# Altium PCB AICat V1.3.双面板 板厚1.6mm.PcbDoc (part 2 of 3)
Units mm, origin at the board's own origin, x right, y up, seen from the top; angles counter-clockwise.
Board outline 152.4 x 101.6 mm, 2 copper layers (Top Layer, Bottom Layer); 95 components, 81 nets, 296 pads, 205 vias.
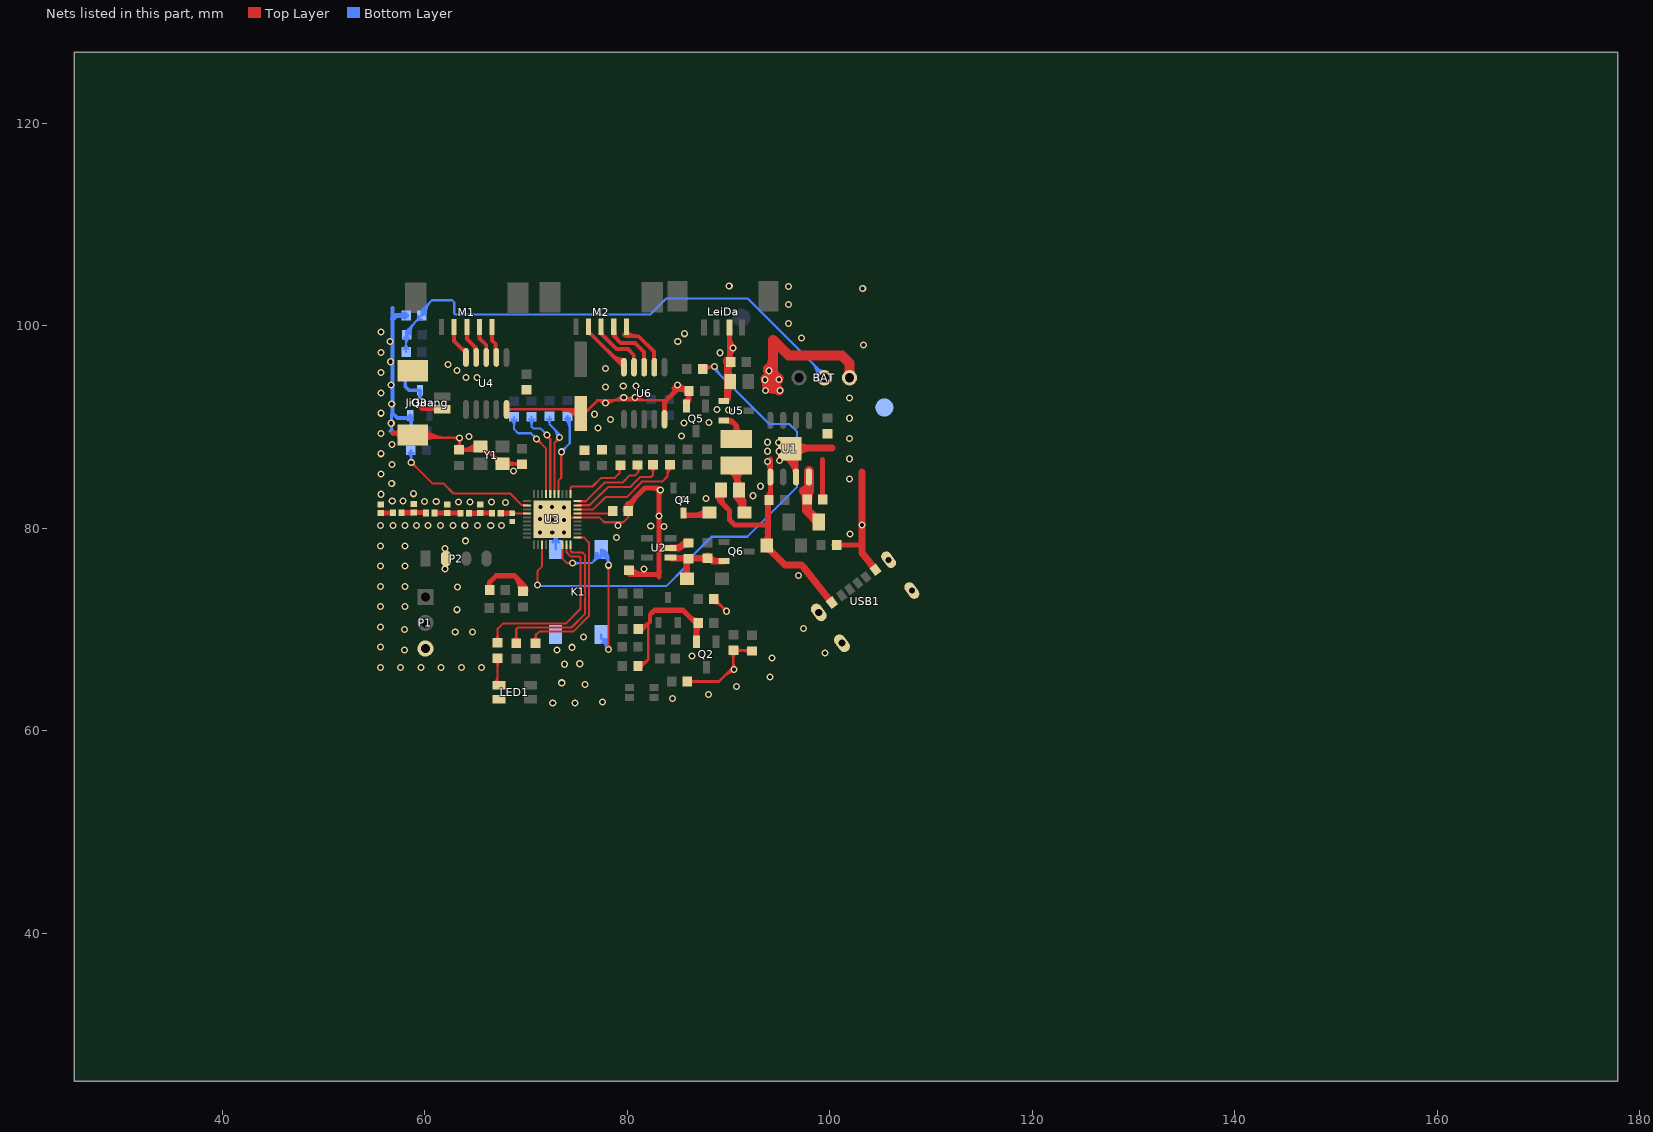
[diagram p2: the nets of this part, all layers, seen from the top]

## Via types
v1: diameter 0.7, hole 0.4, Top Layer to Bottom Layer, tented both sides, 205 vias

## Nets (pads, with @x,y where several pads share a name; then routed paths per layer and width w, separated by ;. In a path a pad name is that pad's centre, name@x,y a point inside that pad or via, vN(x,y) a via of type N, cw(c..) or ccw(c..) an arc to the next point about the centre after c; other vN are vias at no path point) (continued)
GND: BAT.1 C1.1 C2.1 C4.1 C5.2 C6.1 C8.2 C9.1 C11.1 C12.1 C13.1 C14.1 C16.1 C17.1 C18.2 C19.2 C20.2 C21.1 C22.1 C24.1 C25.2 C26.2 C27.1 D1.1 D2.2 GND.1 JiGuang.3 JiGuang.4 K1.1 K1.2 LED1.1 LeiDa.2 P1.4 P2.2 Q2.2 Q3.2 Q5.2 R1.1 R4.2 R5.2 R13.1 R17.2 R18.1 R20.1 R34.1 R36.2 R37.1 U1.1 U1.3 U1.9 U2.2 U3.16 U3.41 U4.5 U5.1 U6.5 USB1.7 USB1.A12 USB1.B12 Y1.2 Y1.4 | length 375.2
  Top Layer w0.203: U3.41@74.315,80.99 74.396,81.071 77.247,81.071 77.724,80.594 79.604,80.594 80.094,81.085 ; C22.1@80.094,81.712 80.094,81.085 ; 80.094,81.085 cw(c80.411,81.085) 80.263,81.365 ccw(c80.411,81.085) 80.094,81.085 ; 80.094,81.085 ccw(c79.777,81.085) 79.925,81.365 cw(c79.777,81.085) 80.094,81.085
  Top Layer w0.254: C16.1@63.398,87.74 63.449,87.79 v1(63.449,88.925) 59.104,88.925 JiGuang.4@58.824,89.205 58.621,89.408 56.718,89.408 ; Y1.4@65.495,88.076 65.772,88.076 67.472,86.376 Y1.2@67.695,86.376 ; U4.5@68.077,91.732 75.012,91.732 C20.2@75.41,91.335 75.765,91.335 77.064,92.634 ; 77.462,92.634 cw(c77.462,92.174) v1@77.879,92.367 ; v1@77.649,92.26 ccw(c77.064,91.989) 77.064,92.634 ; v1@77.829,92.376 cw(c78.451,91.755) 78.451,92.634 ; v1@78.009,92.197 cw(c79.064,91.142) 79.064,92.634 ; 78.442,92.634 ccw(c78.442,94.126) v1@79.497,93.071 ; 79.055,92.634 ccw(c79.055,93.513) v1@79.676,92.891 ; v1@79.559,92.634 ccw(c79.559,94.126) v1@80.614,93.071 ; v1@79.632,92.891 ccw(c80.254,93.513) 80.254,92.634 ; v1@79.812,93.071 ccw(c80.867,94.126) v1@80.867,92.634 ; 80.172,92.634 ccw(c80.172,93.513) v1@80.794,92.891 ; v1@80.75,92.891 ccw(c81.372,93.513) 81.372,92.634 ; v1@80.93,93.071 ccw(c81.985,94.126) 81.985,92.634 ; C9.1@81.059,66.396 81.458,66.396 82.067,67.005 ; C9.1@81.08,66.502 ccw(c81.251,67.187) 81.75,66.688 ; C9.1@81.141,66.749 ccw(c81.378,67.695) 82.067,67.005 ; 82.054,70.573 82.067,70.56 82.067,67.005 ; 84.103,92.866 83.871,92.634 77.064,92.634 ; R18.1@85.936,64.872 89.052,64.872 89.529,65.348 ; R18.1@86.175,64.633 cw(c86.752,64.056) 86.752,64.872 cw(c86.752,65.688) R18.1@86.175,65.111 ; R37.1@88.552,72.637 cw(c88.552,71.657) 89.245,72.35 ; R37.1@88.552,73 88.595,73 v1(89.789,71.806) ; R37.1@88.89,72.975 ccw(c89.543,72.975) 89.081,72.513 ; 89.332,65.151 89.529,65.348 ; v1@89.566,71.806 ccw(c89.028,71.806) 89.408,72.186 ccw(c89.789,72.567) v1@89.789,72.029 ; R4.2@92.304,67.886 92.253,67.937 R5.2@90.475,67.937 90.475,66.294 89.529,65.348 ; 56.718,89.408 cw(c56.718,88.55) 57.516,88.866 ccw(c56.718,88.55) 56.718,89.408 ; 56.718,89.408 ccw(c56.718,90.749) 57.699,89.834 cw(c56.718,90.749) 56.718,89.408 ; 57.257,89.408 cw(c57.257,89.946) 56.876,89.566 ccw(c57.257,89.946) 57.257,89.408 ; 57.257,89.408 ccw(c57.257,88.87) 56.876,89.25 cw(c57.257,88.87) 57.257,89.408 ; 62.911,88.925 cw(c62.911,88.387) v1@63.292,88.768 ; 62.911,88.925 ccw(c62.911,89.464) 63.292,89.083 cw(c62.911,89.464) 62.911,88.925 ; 62.911,88.925 cw(c62.911,88.387) v1@63.292,88.768 ; v1@63.292,88.768 cw(c62.911,88.387) 63.449,88.387 ; v1@63.292,88.768 cw(c62.911,88.387) 63.449,88.387 ; 63.449,88.387 cw(c63.988,88.387) 63.607,88.768 ccw(c63.988,88.387) 63.449,88.387 ; 68.446,91.732 cw(c68.446,92.102) 68.185,91.841 ccw(c68.446,92.102) 68.446,91.732 ; 68.446,91.732 ccw(c68.446,91.363) 68.185,91.624 cw(c68.446,91.363) 68.446,91.732 ; 90.475,67.121 cw(c91.291,67.121) 90.714,67.698 ccw(c91.291,67.121) 90.475,67.121 ; 90.475,67.121 ccw(c89.659,67.121) 90.236,67.698 cw(c89.659,67.121) 90.475,67.121 ; 91.316,67.937 cw(c91.316,68.753) 90.739,68.176 ccw(c91.316,68.753) 91.316,67.937 ; 91.316,67.937 ccw(c91.316,67.121) 90.739,67.698 cw(c91.316,67.121) 91.316,67.937 ; 57.092,89.408 cw(c57.092,88.698) 57.752,88.959 ccw(c57.092,88.698) 57.092,89.408 ; 57.303,89.408 ccw(c57.303,90.205) 57.885,89.661 cw(c57.303,90.205) 57.303,89.408 ; JiGuang.4@59.388,89.319 ccw(c60.338,90.268) 60.338,88.925 cw(c60.338,90.268) JiGuang.4@59.388,89.319 ; JiGuang.4@59.568,89.498 ccw(c60.951,90.882) 60.951,88.925 cw(c60.951,90.882) JiGuang.4@59.568,89.498 ; JiGuang.4@59.747,89.678 ccw(c61.564,91.495) 61.564,88.925 cw(c61.564,91.495) JiGuang.4@59.747,89.678 ; JiGuang.4@59.927,88.552 cw(c60.828,87.651) 60.828,88.925 ccw(c60.828,87.651) JiGuang.4@59.927,88.552 ; JiGuang.4@59.927,89.858 ccw(c62.177,92.108) 62.177,88.925 cw(c62.177,92.108) JiGuang.4@59.927,89.858 ; C16.1@63.184,87.979 ccw(c62.545,88.618) 63.449,88.618 cw(c62.545,88.618) C16.1@63.184,87.979 ; 63.449,88.493 ccw(c64.177,88.493) 63.662,87.979 cw(c64.177,88.493) 63.449,88.493 ; Y1.4@65.595,87.603 cw(c65.595,86.034) 66.705,87.143 ccw(c65.595,86.034) Y1.4@65.595,87.603 ; Y1.4@65.595,87.857 cw(c65.595,86.901) 66.271,87.577 ccw(c65.595,86.901) Y1.4@65.595,87.857 ; Y1.4@66.068,88.076 ccw(c66.783,88.076) 66.278,87.57 cw(c66.783,88.076) Y1.4@66.068,88.076 ; 66.577,87.27 ccw(c67.595,88.288) 67.595,86.849 cw(c67.595,88.288) 66.577,87.27 ; 66.875,86.973 cw(c66.278,86.376) 67.122,86.376 ccw(c66.278,86.376) 66.875,86.973 ; Y1.2@67.011,86.837 ccw(c67.595,87.421) 67.595,86.595 cw(c67.595,87.421) Y1.2@67.011,86.837 ; 73.308,91.732 cw(c73.308,89.233) 75.076,91 ccw(c73.308,89.233) 73.308,91.732 ; 73.921,91.732 cw(c73.921,89.846) 75.255,91.18 ccw(c73.921,89.846) 73.921,91.732 ; 74.535,91.732 cw(c74.535,90.46) 75.435,91.36 ccw(c74.535,90.46) 74.535,91.732 ; 89.668,65.487 cw(c90.526,64.63) 90.526,65.842 ccw(c90.526,64.63) 89.668,65.487 ; 90.102,65.921 cw(c90.526,65.497) 90.526,66.096 ccw(c90.526,65.497) 90.102,65.921 ; v1@90.368,66.223 ccw(c90.11,66.481) 90.475,66.481 cw(c90.11,66.481) v1@90.368,66.223 ; 90.475,66.726 ccw(c91.187,66.726) 90.683,66.223 cw(c91.187,66.726) 90.475,66.726 ; 91.34,67.937 cw(c91.34,66.948) 92.04,67.647 ccw(c91.34,66.948) 91.34,67.937 ; 91.585,67.937 ccw(c91.585,68.58) 92.04,68.125 cw(c91.585,68.58) 91.585,67.937
  Top Layer w0.381: C16.1@63.398,87.74 65.159,87.74 Y1.4@65.495,88.076 ; Y1.2@67.695,86.376 69.572,86.376 C17.1@69.621,86.327 ; R17.2@81.055,69.976 ccw(c81.207,70.505) 81.597,70.116 ; R17.2@81.085,70.053 81.534,70.053 82.054,70.573 ; R17.2@81.16,70.342 ccw(c81.411,71.216) 82.054,70.573 ; 82.407,71.633 82.245,71.472 82.245,70.764 82.054,70.573 ; C25.2@89.128,83.312 C25.2@89.128,83.49 ; 64.086,87.74 cw(c64.086,88.402) 63.617,87.934 ccw(c64.086,88.402) 64.086,87.74 ; 64.086,87.74 ccw(c64.086,87.077) 63.617,87.546 cw(c64.086,87.077) 64.086,87.74 ; 68.784,86.376 cw(c68.784,87.364) 68.085,86.665 ccw(c68.784,87.364) 68.784,86.376 ; 68.784,86.376 ccw(c68.784,85.387) 68.085,86.086 cw(c68.784,85.387) 68.784,86.376 ; C16.1@63.595,87.74 ccw(c63.595,89.876) 65.106,88.365 cw(c63.595,89.876) C16.1@63.595,87.74 ; 64.515,87.74 ccw(c64.515,88.956) 65.375,88.096 cw(c64.515,88.956) 64.515,87.74 ; 68.815,86.376 cw(c68.815,85.545) 69.402,86.132 ccw(c68.815,85.545) 68.815,86.376 ; 69.052,86.376 ccw(c69.052,86.871) 69.402,86.521 cw(c69.052,86.871) 69.052,86.376
  Top Layer w0.508: R36.2@66.264,74.063 ccw(c65.904,74.423) 66.413,74.423 ccw(c66.922,74.423) R36.2@66.562,74.063 ; R36.2@66.413,73.889 66.413,74.668 67.056,75.311 68.859,75.311 69.723,74.447 C27.1@69.723,73.77 ; 68.841,75.33 cw(c67.281,73.77) C27.1@69.487,73.77 ; C27.1@69.574,73.919 ccw(c69.214,74.279) 69.723,74.279 ccw(c70.232,74.279) C27.1@69.872,73.919 ; 69.708,74.462 cw(c69.015,73.77) C27.1@69.995,73.77 ; C4.1@80.003,75.626 ccw(c80.46,76.084) C4.1@80.46,75.437 ; 80.094,82.38 80.145,82.38 81.737,83.972 82.829,83.972 ; C4.1@80.213,75.437 82.93,75.437 83.16,75.667 ; C4.1@80.362,75.986 ccw(c81.686,77.31) 81.686,75.437 ; C4.1@80.599,75.668 ccw(c81.155,76.224) 81.155,75.437 ; R17.2@81.085,70.053 R17.2@81.483,70.053 ; 82.407,71.633 82.681,71.907 85.496,71.907 86.741,70.663 R13.1@87.012,70.663 ; 82.539,83.972 cw(c82.539,83.047) v1@83.193,83.701 ; 83.134,75.209 83.134,83.668 82.829,83.972 ; 83.134,83.231 cw(c83.8,83.231) v1@83.329,83.701 ; 83.16,78.105 83.21,78.054 ; v1@83.171,83.735 ccw(c82.829,83.607) 82.829,83.972 ; 83.219,78.063 U2.2@84.256,78.063 ; U6.5@83.673,90.767 83.673,92.436 83.871,92.634 ; 84.103,92.866 84.938,93.701 R34.1@86.098,93.701 ; Q5.2@85.842,92.182 85.842,92.487 86.098,92.743 ; 86.146,71.258 ccw(c87.012,72.124) R13.1@87.012,70.899 ; 89.128,82.695 cw(c90.013,82.695) C25.2@89.459,83.385 ; C25.2@89.128,83.49 89.128,82.703 ; C25.2@89.42,83.191 ccw(c90.15,82.832) 89.575,82.256 ; 89.891,81.94 89.128,82.703 ; C24.1@90.084,96.676 cw(c91.564,96.676) v1@90.517,97.722 ; 90.084,97.678 ccw(c90.337,97.678) 90.158,97.499 ; 90.084,97.902 cw(c90.337,97.902) 90.158,98.081 ; 90.084,98.904 ccw(c91.564,98.904) v1@90.517,97.858 ; LeiDa.2@90.084,99.821 90.084,96.547 C24.1@90.213,96.418 ; 90.094,81.737 90.094,80.848 90.602,80.34 93.904,80.34 ; v1@93.785,86.546 cw(c92.947,85.708) U1.1@94.132,85.708 ; 93.828,79.578 93.904,79.502 ; 93.989,83.363 94.132,83.506 ; U1.1@94.132,85.649 U1.1@94.132,85.065 ; 94.132,86.843 U1.1@94.132,85.065 ; U1.9@96.037,87.859 96.672,87.224 U1.3@96.672,85.065 ; C6.1@99.297,82.855 99.297,86.774 ; C1.1@100.389,78.334 103.119,78.334 103.169,78.283 ; C1.1@100.538,78.184 cw(c100.898,77.824) 100.898,78.334 cw(c100.898,78.843) C1.1@100.538,78.483 ; C1.1@100.817,78.184 cw(c101.178,77.824) 101.178,78.334 cw(c101.178,78.843) C1.1@100.817,78.483 ; 86.098,92.743 cw(c85.805,92.743) 85.833,92.451 ccw(c85.805,92.743) 86.098,92.743 ; 86.098,92.743 ccw(c86.485,92.356) 85.938,92.356 cw(c86.485,92.356) 86.098,92.743 ; 86.098,92.743 R34.1@86.098,93.701 ; 86.098,93.014 cw(c86.607,93.014) 86.247,93.374 ccw(c86.607,93.014) 86.098,93.014 ; 86.098,93.014 ccw(c85.589,93.014) 85.949,93.374 cw(c85.589,93.014) 86.098,93.014 ; R34.1@86.098,93.701 cw(c86.098,95.089) 85.036,94.194 ccw(c86.098,95.089) R34.1@86.098,93.701 ; 89.128,82.703 ccw(c88.679,82.703) 88.939,83.069 cw(c88.679,82.703) 89.128,82.703 ; 89.128,82.703 cw(c89.576,82.703) 89.316,83.069 ccw(c89.576,82.703) 89.128,82.703 ; 94.132,83.506 cw(c93.509,83.506) 93.874,83 ccw(c93.509,83.506) 94.132,83.506 ; 94.132,83.506 U1.1@94.132,85.065 ; 99.297,83.389 cw(c98.787,83.389) 99.147,83.029 ccw(c98.787,83.389) 99.297,83.389 ; 99.297,83.389 ccw(c99.806,83.389) 99.446,83.029 cw(c99.806,83.389) 99.297,83.389 ; C22.1@79.797,81.737 cw(c80.511,81.737) 80.006,82.241 ccw(c80.511,81.737) C22.1@79.797,81.737 ; C22.1@80.305,81.737 cw(c82.245,81.737) 80.873,83.109 ccw(c82.245,81.737) C22.1@80.305,81.737 ; 84.512,93.275 ccw(c83.654,94.132) 84.867,94.132 cw(c83.654,94.132) 84.512,93.275 ; 84.648,93.867 ccw(c85.006,94.168) 85.006,93.701 cw(c85.006,94.168) 84.648,93.867 ; 85.281,93.701 cw(c85.281,92.756) 85.949,93.424 ccw(c85.281,92.756) 85.281,93.701 ; Q5.2@85.774,92.423 ccw(c84.991,93.206) 86.098,93.206 cw(c84.991,93.206) Q5.2@85.774,92.423 ; 90.084,97.264 ccw(c91.034,97.264) 90.362,96.593 cw(c91.034,97.264) 90.084,97.264 ; R1.1@93.848,82.978 ccw(c93.162,83.664) 94.132,83.664 cw(c93.162,83.664) R1.1@93.848,82.978 ; U1.9@95.539,87.114 cw(c94.122,84.993) 96.672,84.993 ccw(c94.122,84.993) U1.9@95.539,87.114 ; U1.9@95.822,87.536 cw(c94.758,85.944) 96.672,85.944 ccw(c94.758,85.944) U1.9@95.822,87.536 ; U1.9@96.104,87.958 cw(c95.393,86.895) 96.672,86.895 ccw(c95.393,86.895) U1.9@96.104,87.958
  Top Layer w0.6: C22.1@80.094,81.712 80.094,82.38 ; 85.046,77.983 cw(c86.005,77.024) C2.1@86.005,78.38 ; 85.126,78.063 85.761,78.697 C2.1@86.03,78.697 ; Q2.2@86.858,68.789 86.858,70.508 R13.1@87.012,70.663 ; D1.1@93.555,78.604 ccw(c92.713,79.446) 93.904,79.446 ; D1.1@93.583,78.629 ccw(c93.074,79.284) 93.904,79.284 93.904,79.502 93.904,80.34 93.904,81.966 R1.1@93.904,82.931 ; U2.2@84.556,78.063 ccw(c84.556,79.438) 85.529,78.465 cw(c84.556,79.438) U2.2@84.556,78.063 ; 86.858,69.866 cw(c87.784,69.866) 87.129,70.521 ccw(c87.784,69.866) 86.858,69.866 ; D1.1@93.548,78.18 ccw(c92.687,79.04) 93.904,79.04 cw(c92.687,79.04) D1.1@93.548,78.18 ; 93.904,82.155 cw(c94.622,82.155) 94.114,82.662 ccw(c94.622,82.155) 93.904,82.155
  Top Layer w0.7: U2.2@84.256,78.063 85.126,78.063 ; Q5.2@85.791,92.436 Q5.2@85.92,92.565 ; C24.1@89.781,96.418 C24.1@89.781,96.614 ; U5.1@89.891,92.784 C24.1@89.891,96.368 ; D1.1@93.666,78.292 95.58,76.378 97.196,76.378 97.452,76.121 USB1.B12@100.205,72.663 ; D1.1@93.767,77.942 cw(c93.767,77.342) D1.1@94.192,77.766 ; D1.1@94.017,78.192 ccw(c94.624,78.192) D1.1@94.195,77.763 ; U1.9@96.825,87.935 100.203,87.935 ; 103.169,85.553 103.169,78.283 103.169,77.608 USB1.A12@104.518,75.913 ; 89.891,93.106 cw(c91.396,93.106) 90.332,94.17 ccw(c91.396,93.106) 89.891,93.106 ; 89.891,95.338 cw(c91.268,95.338) 90.294,96.312 ccw(c91.268,95.338) 89.891,95.338 ; 89.891,95.87 ccw(c91.396,95.87) 90.332,94.806 cw(c91.396,95.87) 89.891,95.87 ; U1.9@96.603,87.293 cw(c98.153,85.743) 98.153,87.935 ccw(c98.153,85.743) U1.9@96.603,87.293 ; U1.9@96.603,88.424 ccw(c97.785,89.606) 97.785,87.935 cw(c97.785,89.606) U1.9@96.603,88.424
  Top Layer w1: v1@93.652,94.806 cw(c93.249,93.742) 94.386,93.742 ; v1@93.705,94.56 ccw(c92.06,96.205) 94.386,96.205 ; 93.803,94.103 cw(c93.987,92.997) 94.78,93.79 ; v1@93.908,95.576 ccw(c92.754,96.73) 94.386,96.73 ; v1@93.908,95.788 cw(c92.754,94.634) 94.386,94.634 ; 93.934,93.849 ccw(c92.841,94.942) 94.386,94.942 ; v1@94.111,95.449 ccw(c93.448,96.112) 94.386,96.112 ; v1@94.111,95.661 cw(c93.448,94.997) 94.386,94.997 ; 94.386,93.898 cw(c95.451,93.898) v1@94.921,94.821 ; 94.386,94.051 cw(c95.585,94.051) v1@94.738,94.899 ; 94.386,95.02 ccw(c96.366,95.02) v1@94.966,93.62 ; 94.386,95.534 ccw(c95.585,95.534) v1@94.738,94.687 ; 94.386,95.801 ccw(c96.106,95.801) v1@94.89,94.585 ; 94.539,94.031 94.386,94.183 94.386,98.603 95.936,97.053 101.194,97.053 101.953,96.294 BAT.1@101.953,94.864
  Bottom Layer w0.254: 56.718,89.408 56.718,91.262 56.82,91.364 ; v1(72.593,79.578) 72.932,79.24 ; K1.1@72.625,78.641 ccw(c72.193,79.24) 72.932,79.24 ; K1.1@72.932,77.917 72.932,79.24 ; K1.1@73.238,78.641 cw(c73.67,79.24) 72.932,79.24 ; 56.718,89.946 cw(c56.18,89.946) 56.561,89.566 ccw(c56.18,89.946) 56.718,89.946 ; 56.718,89.946 ccw(c57.257,89.946) 56.876,89.566 cw(c57.257,89.946) 56.718,89.946
  Bottom Layer w0.381: 56.82,101.752 56.82,100.66 56.82,91.364 57.302,90.881 58.304,90.881 Q3.2@58.575,91.153 58.666,91.062 R20.1@58.666,89.56 ; 58.666,90.248 cw(c58.003,90.248) 58.472,89.779 ccw(c58.003,90.248) 58.666,90.248 ; 58.666,90.248 ccw(c59.329,90.248) 58.86,89.779 cw(c59.329,90.248) 58.666,90.248 ; 58.223,90.881 ccw(c58.223,91.271) 58.498,90.995 cw(c58.223,91.271) 58.223,90.881 ; Q3.2@58.498,90.84 cw(c58.092,90.435) 58.666,90.435 ccw(c58.092,90.435) Q3.2@58.498,90.84
  Bottom Layer w0.508: 56.82,100.66 57.175,101.016 C8.2@58.183,101.016 ; C8.2@58.034,100.867 ccw(c57.674,100.506) 57.674,101.016 ccw(c57.674,101.525) C8.2@58.034,101.165
  other v1: 72.644,62.738 74.854,62.763 77.546,62.84 84.48,63.195 88.011,63.602 90.805,64.364 75.844,64.592 73.533,64.745 94.082,65.303 90.526,66.065 55.626,66.264 57.626,66.264 59.626,66.264 61.626,66.264 63.626,66.264 65.626,66.264 73.787,66.573 75.311,66.624 94.31,67.183 86.411,67.386 99.543,67.666 58,68 73.076,67.996 74.549,68.25 55.626,68.264 75.667,69.266 63.017,69.774 64.719,69.774 58,70 97.409,70.104 55.626,70.264 63.195,71.958 55.626,72.264 58.039,72.264 63.221,74.219 55.626,74.264 58.039,74.264 96.901,75.336 81.636,75.971 62,76 55.626,76.264 58.039,76.264 62,78 55.626,78.264 58.039,78.264 64.033,78.765 78.943,79.07 102.006,79.451 71.399,79.578 73.736,79.578 83.617,80.162 82.321,80.239 55.626,80.264 56.871,80.264 58.039,80.264 59.182,80.264 60.325,80.264 61.57,80.264 62.789,80.264 63.957,80.264 65.227,80.264 66.523,80.264 67.589,80.264 79.096,80.264 103.169,80.315 73.736,80.823 72.546,80.871 71.399,80.899 83.134,81.229 73.736,82.067 72.568,82.093 71.425,82.118 67.97,82.55 63.348,82.575 64.465,82.575 66.599,82.575 59.969,82.652 61.138,82.652 57.861,82.677 56.794,82.702 85.522,82.855 87.757,82.956 92.431,83.21 55.677,83.363 58.903,83.414 83.261,83.769 93.142,84.15 56.744,84.43 101.953,84.864 55.677,85.363 68.758,85.649 56.769,86.309 93.853,86.614 95.021,86.69 101.953,86.864 55.677,87.363 93.853,87.605 94.971,87.605 56.769,88.29 94.945,88.468 93.853,88.494 101.953,88.864 64.389,89.052 85.369,89.129 55.677,89.363 77.114,89.916 56.693,90.373 85.598,90.399 88.062,90.449 78.334,90.729 101.953,90.864 76.759,91.262 55.677,91.363 90.018,91.694 88.849,91.719 56.744,92.278 77.851,92.354 101.953,92.864 79.654,92.913 80.772,92.913 55.677,93.363 93.65,93.624 95.098,93.624 77.851,93.955 79.604,94.031 80.848,94.031 84.963,94.132 56.667,94.158 93.599,94.666 94.996,94.691 64.059,94.894 65.151,94.894 55.677,95.363 94.005,95.555 63.17,95.58 77.851,95.783 62.306,96.19 56.617,96.444 89.154,97.333 55.677,97.363 90.449,97.79 103.327,98.095 56.566,98.45 84.988,98.45 97.206,98.781 85.649,99.212 55.677,99.363 95.936,100.203 95.91,102.108 103.251,103.657 95.936,103.886 90.068,103.911
JIGUANG_CON: R19.2 U3.32 | length 21.7
  Top Layer w0.203: v1(58.674,86.512) 60.782,84.404 61.874,84.404 62.84,83.439 68.435,83.439 69.583,82.29 70.079,82.29 U3.32@70.098,82.271 ; 59.098,86.088 cw(c59.522,86.512) 58.922,86.512 ccw(c59.522,86.512) 59.098,86.088 ; 59.098,86.088 ccw(c58.674,85.664) 58.674,86.264 cw(c58.674,85.664) 59.098,86.088
  Bottom Layer w0.203: R19.2@58.641,87.706 58.674,87.673 v1(58.674,86.512) ; 58.674,87.112 cw(c58.074,87.112) 58.498,86.688 ccw(c58.074,87.112) 58.674,87.112 ; 58.674,87.112 ccw(c59.274,87.112) 58.85,86.688 cw(c59.274,87.112) 58.674,87.112 ; R19.2@58.384,87.424 cw(c57.683,86.723) 58.674,86.723 ccw(c57.683,86.723) R19.2@58.384,87.424 ; R19.2@58.527,87.568 cw(c58.173,87.214) 58.674,87.214 ccw(c58.173,87.214) R19.2@58.527,87.568 ; 58.674,86.885 cw(c59.437,86.885) 58.898,87.424 ccw(c59.437,86.885) 58.674,86.885
KEY: K1.3 K1.4 U3.8 | length 33.1
  Top Layer w0.203: U3.8@73.597,78.372 73.597,77.05 74.092,76.556 v1(74.6,76.556) ; v1@77.98,68.222 ccw(c77.556,68.646) 78.156,68.646 ccw(c78.755,68.646) v1@78.331,68.222 ; v1@77.98,76.177 cw(c77.556,75.753) 78.156,75.753 cw(c78.755,75.753) v1@78.331,76.177 ; v1(78.156,76.352) 78.156,68.072 v1@78.181,68.047
  Bottom Layer w0.203: v1(74.6,76.556) 76.505,76.556 77.431,77.482 K1.3@77.431,77.917 78.156,77.193 v1(78.156,76.352) ; v1@74.775,76.38 cw(c75.199,75.956) 75.199,76.556 cw(c75.199,77.155) v1@74.775,76.731 ; 76.572,76.623 ccw(c75.789,77.406) K1.3@76.887,77.547 ; 76.725,76.776 cw(c77.431,76.07) K1.3@77.431,77.069 ; 76.865,76.916 ccw(c76.308,77.473) K1.3@77.089,77.573 ; K1.3@77.385,77.275 cw(c77.265,76.392) v1@78.156,76.392 ; K1.3@77.412,77.476 cw(c77.297,76.625) v1@78.156,76.625 ; K1.4@77.431,69.517 77.431,69.127 78.181,68.377 v1@78.181,68.047 ; K1.3@77.44,77.678 cw(c77.328,76.858) 78.156,76.858 ; K1.3@77.467,77.879 cw(c77.36,77.09) 78.156,77.09 ; K1.4@77.471,68.67 cw(c77.532,67.818) 78.136,68.422 cw(c78.614,68.9) K1.4@77.961,69.075 ; K1.4@77.48,69.078 cw(c76.449,68.047) v1@77.907,68.047 ; K1.4@77.765,69.128 ccw(c78.221,69.005) K1.4@77.887,68.671 ; K1.4@77.827,68.731 cw(c77.143,68.047) v1@78.111,68.047 ; v1@77.98,76.528 ccw(c77.556,76.952) 78.156,76.952 ccw(c78.755,76.952) v1@78.331,76.528
  other v1: 78.156,68.047
LED_B: R8.2 U3.9 | length 20.5
  Top Layer w0.203: R8.2@67.208,68.69 67.208,70.079 67.716,70.587 73.914,70.587 75.387,72.06 75.387,77.089 75.246,77.23 74.382,77.23 73.997,77.616 U3.9@73.997,78.372 ; 67.208,69.567 cw(c66.331,69.567) 66.951,68.947 ccw(c66.331,69.567) 67.208,69.567 ; 67.208,69.567 ccw(c68.086,69.567) 67.465,68.947 cw(c68.086,69.567) 67.208,69.567
LED_G: R11.2 U3.10 | length 19.6
  Top Layer w0.203: R11.2@69.037,68.664 69.037,70.028 69.215,70.206 74.498,70.206 75.844,71.552 75.844,77.318 75.551,77.611 74.54,77.611 74.397,77.754 U3.10@74.397,78.372 ; 69.037,69.542 cw(c68.16,69.542) 68.78,68.921 ccw(c68.16,69.542) 69.037,69.542 ; 69.037,69.542 ccw(c69.915,69.542) 69.294,68.921 cw(c69.915,69.542) 69.037,69.542
LED_R: R14.2 U3.11 | length 18
  Top Layer w0.203: R14.2@70.709,68.917 ccw(c70.288,69.418) 70.942,69.418 ; R14.2@70.71,68.896 ccw(c70.089,69.517) 70.968,69.517 ; R14.2@70.968,68.664 R14.2@70.942,68.639 70.942,69.418 ; 70.968,69.515 ccw(c71.844,69.515) R14.2@71.224,68.896 ; R14.2@71.176,68.917 cw(c71.596,69.418) 70.942,69.418 ; U3.11@75.096,79.071 75.742,79.071 76.225,78.588 76.225,71.349 74.701,69.825 71.349,69.825 70.942,69.418
LEIDA_CON: R33.2 U3.3 | length 60
  Top Layer w0.203: v1(71.145,74.387) 71.145,75.794 71.597,76.245 U3.3@71.597,78.372 ; R33.2@87.308,95.936 87.333,95.961 v1(88.595,95.961) ; 87.996,95.961 cw(c87.996,95.362) 88.42,95.786 ccw(c87.996,95.362) 87.996,95.961 ; 87.996,95.961 ccw(c87.996,96.561) 88.42,96.137 cw(c87.996,96.561) 87.996,95.961 ; v1(88.595,95.961) ccw(c88.595,94.854) 87.722,95.534 cw(c88.595,94.854) v1(88.595,95.961) ; R33.2@87.561,95.659 cw(c88.179,95.178) 88.179,95.961 ccw(c88.179,95.178) R33.2@87.561,95.659
  Bottom Layer w0.203: v1(71.145,74.387) 71.212,74.32 83.896,74.32 85.7,76.124 85.7,76.543 88.321,79.164 91.846,79.164 96.768,84.086 96.768,89.535 96.006,90.297 94.031,90.297 88.595,95.733 v1(88.595,95.961) ; v1@88.64,95.961 ccw(c89.301,95.961) 88.834,95.494 cw(c89.301,95.961) v1@88.64,95.961 ; v1@88.844,95.961 ccw(c89.995,95.961) 89.181,95.147 cw(c89.995,95.961) v1@88.844,95.961
MOTORA_INA: R21.2 U3.27 | length 16.6
  Top Layer w0.203: v1(71.044,88.824) 71.997,87.871 71.997,83.947 ; U3.27@71.997,83.371 71.997,83.947 ; 71.997,84.316 71.997,83.947 ; 71.468,88.4 cw(c71.892,88.824) 71.292,88.824 ccw(c71.892,88.824) 71.468,88.4 ; 71.468,88.4 ccw(c71.044,87.976) 71.044,88.575 cw(c71.044,87.976) 71.468,88.4
  Bottom Layer w0.203: R21.2@68.834,91 68.834,89.764 69.215,89.383 70.485,89.383 v1(71.044,88.824) ; 68.834,90.123 cw(c69.711,90.123) 69.091,90.743 ccw(c69.711,90.123) 68.834,90.123 ; 68.834,90.123 ccw(c67.957,90.123) 68.577,90.743 cw(c67.957,90.123) 68.834,90.123 ; 70.62,89.248 cw(c70.196,88.824) 70.795,88.824 ccw(c70.196,88.824) 70.62,89.248 ; 70.62,89.248 ccw(c71.044,89.672) 71.044,89.072 cw(c71.044,89.672) 70.62,89.248
MOTORA_INB: R22.2 U3.26 | length 14.1
  Top Layer w0.203: v1@71.984,89.205 72.397,88.791 U3.26@72.397,83.371 ; v1@72.085,88.956 cw(c72.085,88.602) 72.336,88.853 ; v1@72.307,89.092 ccw(c72.499,88.994) 72.346,88.842
  Bottom Layer w0.203: R22.2@70.561,91.026 70.561,90.018 70.714,89.865 71.425,89.865 v1(72.085,89.205) ; 70.561,90.148 cw(c71.439,90.148) 70.818,90.769 ccw(c71.439,90.148) 70.561,90.148 ; 70.561,90.148 ccw(c69.684,90.148) 70.304,90.769 cw(c69.684,90.148) 70.561,90.148 ; 71.661,89.629 cw(c71.237,89.205) 71.837,89.205 ccw(c71.237,89.205) 71.661,89.629 ; 71.661,89.629 ccw(c72.085,90.053) 72.085,89.453 cw(c72.085,90.053) 71.661,89.629
MOTORA_INC: R23.2 U3.25 | length 16
  Top Layer w0.203: U3.25@72.797,83.371 72.797,88.418 v1(73.33,88.951) ; 72.906,88.527 cw(c73.33,88.103) 73.33,88.702 ccw(c73.33,88.103) 72.906,88.527 ; 72.906,88.527 ccw(c72.482,88.951) 73.081,88.951 cw(c72.482,88.951) 72.906,88.527
  Bottom Layer w0.203: R23.2@72.314,91.051 72.314,90.297 ; v1(73.33,88.951) 73.33,89.281 72.314,90.297 ; 72.314,90.297 cw(c72.914,90.297) 72.54,90.767 ccw(c72.914,90.297) 72.314,90.297 ; 72.314,90.297 ccw(c71.713,90.297) 72.087,90.767 cw(c71.713,90.297) 72.314,90.297 ; 72.672,89.939 cw(c71.685,88.951) 73.081,88.951 ccw(c71.685,88.951) 72.672,89.939 ; 73.019,89.592 cw(c72.378,88.951) 73.285,88.951 ccw(c72.378,88.951) 73.019,89.592
MOTORA_IND: R24.2 U3.24 | length 16.1
  Top Layer w0.203: U3.24@73.197,83.371 73.197,84.703 73.482,84.988 73.482,87.452 v1@73.444,87.49 ; v1@73.332,87.378 cw(c72.969,87.015) 73.482,87.015 ccw(c72.969,87.015) v1@73.332,87.378 ; 73.482,86.893 cw(c74.169,86.893) 73.683,87.378 ccw(c74.169,86.893) 73.482,86.893
  Bottom Layer w0.203: v1(73.508,87.554) 73.508,87.579 74.32,88.392 74.32,90.848 R24.2@74.092,91.076 ; v1@73.508,87.802 ccw(c73.508,88.341) 73.888,87.96 cw(c73.508,88.341) v1@73.508,87.802 ; v1@73.756,87.554 cw(c74.417,87.554) 73.95,88.021 ccw(c74.417,87.554) v1@73.756,87.554 ; R24.2@73.86,90.819 cw(c72.748,89.708) 74.32,89.708 ccw(c72.748,89.708) R24.2@73.86,90.819 ; R24.2@74.004,90.963 cw(c73.239,90.198) 74.32,90.198 ccw(c73.239,90.198) R24.2@74.004,90.963
MOTORA_OUTA: M1.1 U4.7 | length 4
  Top Layer w0.381: M1.1@66.66,99.871 66.66,98.541 66.98,98.222 66.98,96.97 U4.7@67.077,96.872 ; 66.98,97.971 ccw(c67.528,97.971) 67.14,97.583 cw(c67.528,97.971) 66.98,97.971
MOTORA_OUTB: M1.2 U4.8 | length 3.3
  Top Layer w0.381: M1.2@65.41,99.871 65.41,98.75 66.077,98.083 U4.8@66.077,96.872
MOTORA_OUTC: M1.3 U4.9 | length 4.7
  Top Layer w0.381: M1.3@64.161,99.871 64.161,98.704 65.077,97.788 U4.9@65.077,96.872 ; 64.735,98.13 cw(c64.125,97.52) 64.987,97.52 ccw(c64.125,97.52) 64.735,98.13
MOTORA_OUTD: M1.4 U4.10 | length 5.9
  Top Layer w0.203: 62.834,98.964 M1.4@62.834,99.693 ; 62.834,98.956 cw(c63.094,98.956) 62.977,99.188 ccw(c63.094,98.956) 62.834,98.956
  Top Layer w0.381: M1.4@62.91,99.871 62.91,98.481 64.077,97.315 U4.10@64.077,96.872 ; 63.574,97.818 ccw(c64.077,98.321) 64.077,97.609 cw(c64.077,98.321) 63.574,97.818
MOTORB_INA: R25.2 U3.21 | length 9
  Top Layer w0.203: U3.21@74.397,83.371 74.397,83.973 74.549,84.125 76.567,84.125 77.425,84.982 78.785,84.982 79.223,85.42 79.223,86.123 R25.2@79.324,86.225 ; R25.2@79.042,85.968 cw(c78.607,85.533) 79.223,85.533 ccw(c78.607,85.533) R25.2@79.042,85.968 ; 79.223,85.417 cw(c79.822,85.417) 79.496,85.92 ccw(c79.822,85.417) 79.223,85.417
MOTORB_INB: R26.2 U3.20 | length 10.3
  Top Layer w0.203: U3.20@75.096,82.671 75.915,82.671 76.987,83.744 ; 77.318,84.074 76.987,83.744 ; R26.2@81.026,86.25 81.102,86.174 81.102,85.547 80.772,85.217 80.264,85.217 79.572,84.525 77.769,84.525 76.987,83.744 ; 81.102,85.545 cw(c81.691,85.545) 81.295,85.981 ccw(c81.691,85.545) 81.102,85.545 ; 81.102,85.545 ccw(c80.659,85.545) 80.874,85.933 cw(c80.659,85.545) 81.102,85.545
MOTORB_INC: R27.2 U3.19 | length 12.8
  Top Layer w0.203: U3.19@75.096,82.271 76.277,82.271 77.394,83.388 ; 77.622,83.617 77.394,83.388 ; R27.2@82.55,86.276 82.55,85.268 82.347,85.065 81.991,85.065 81.266,85.065 80.27,84.068 78.099,84.068 77.419,83.388 77.394,83.388 ; 82.55,85.398 cw(c83.427,85.398) 82.807,86.019 ccw(c83.427,85.398) 82.55,85.398 ; 82.55,85.398 ccw(c81.673,85.398) 82.293,86.019 cw(c81.673,85.398) 82.55,85.398
MOTORB_IND: R28.2 U3.18 | length 14.9
  Top Layer w0.203: U3.18@75.096,81.871 76.639,81.871 77.851,83.083 79.932,83.083 81.456,84.607 83.439,84.607 83.97,85.138 R28.2@83.97,86.295 ; 83.97,85.115 cw(c85.036,85.115) 84.414,85.981 ccw(c85.036,85.115) 83.97,85.115 ; 83.97,85.511 cw(c84.751,85.511) 84.295,86.146 ccw(c84.751,85.511) 83.97,85.511
MOTORB_OUTA: M2.1 U6.7 | length 8.6
  Top Layer w0.381: M2.1@79.919,99.972 79.919,99.075 80.035,98.958 81.128,98.958 82.647,97.439 U6.7@82.647,96.263 ; M2.1@79.692,99.119 ccw(c80.079,99.506) 80.079,98.958 cw(c80.079,99.506) M2.1@79.692,99.119 ; M2.1@79.961,99.388 ccw(c80.999,100.426) 80.999,98.958 cw(c80.999,100.426) M2.1@79.961,99.388
MOTORB_OUTB: M2.2 U6.8 | length 7.4
  Top Layer w0.381: M2.2@78.669,99.972 78.669,98.978 79.35,98.298 80.772,98.298 81.647,97.423 U6.8@81.647,96.263 ; M2.2@78.729,99.346 ccw(c79.76,99.346) 79.031,98.617 cw(c79.76,99.346) M2.2@78.729,99.346
MOTORB_OUTC: M2.3 U6.9 | length 6.3
  Top Layer w0.381: M2.3@77.419,99.972 77.419,99.238 78.943,97.714 80.061,97.714 80.647,97.127 U6.9@80.647,96.263 ; M2.3@77.479,99.346 ccw(c77.884,99.346) 77.598,99.059 cw(c77.884,99.346) M2.3@77.479,99.346
MOTORB_OUTD: M2.4 U6.10 | length 10.1
  Top Layer w0.381: M2.4@76.169,99.972 76.169,99.411 U6.10@79.673,95.907 ; M2.4@76.169,99.287 cw(c76.169,98.987) 76.381,99.199 ccw(c76.169,98.987) M2.4@76.169,99.287 ; 78.414,97.165 ccw(c79.673,98.423) 79.673,96.644 cw(c79.673,98.423) 78.414,97.165 ; 79.065,96.515 ccw(c79.673,97.123) 79.673,96.263 cw(c79.673,97.123) 79.065,96.515
NetANT1_1: C14.2 L3.2 | length 1.2
  Top Layer w0.5: C14.2@55.677,81.515 56.833,81.515 L3.2@56.852,81.534
NetBAT1_2: BAT.2 C8.1 R9.1 R15.2 | length 74.6
  Bottom Layer w0.203: R9.1@58.158,97.409 58.158,99.417 R15.2@58.183,99.442 ; R15.2@58.166,99.136 cw(c58.944,99.136) 58.394,99.686 ; R15.2@58.209,99.111 58.209,99.501 C8.1@59.723,101.016 59.723,101.532 60.706,102.514 62.713,102.514 62.916,102.311 62.916,101.219 63.043,101.092 82.245,101.092 83.845,102.692 91.904,102.692 BAT.2@99.656,94.94 ; R15.2@58.369,99.136 cw(c59.638,99.136) 58.741,100.033 ; R15.2@58.572,99.136 cw(c60.332,99.136) 59.087,100.38 ; 59.06,100.353 cw(c59.723,99.69) C8.1@59.723,100.627 ; 59.121,100.413 ccw(c58.543,100.991) C8.1@59.36,100.991 ; C8.1@59.68,101.041 cw(c60.762,101.041) 59.997,101.806 ; C8.1@59.884,101.041 cw(c61.456,101.041) 60.344,102.153 ; C8.1@60.087,101.041 cw(c62.15,101.041) 60.691,102.499 ; 58.158,98.311 cw(c57.281,98.311) 57.901,97.691 ccw(c57.281,98.311) 58.158,98.311 ; 58.158,98.311 ccw(c59.035,98.311) 58.415,97.691 cw(c59.035,98.311) 58.158,98.311 ; R15.2@57.952,98.829 cw(c57.454,98.331) 58.158,98.331 ccw(c57.454,98.331) R15.2@57.952,98.829 ; 58.158,98.086 cw(c59.209,98.086) 58.466,98.829 ccw(c59.209,98.086) 58.158,98.086 ; 58.158,98.577 cw(c58.718,98.577) 58.322,98.973 ccw(c58.718,98.577) 58.158,98.577 ; 98.148,96.448 cw(c96.565,94.864) 98.805,94.864 ccw(c96.565,94.864) 98.148,96.448 ; 98.495,96.101 cw(c97.258,94.864) 99.008,94.864 ccw(c97.258,94.864) 98.495,96.101 ; 98.823,95.774 ccw(c99.453,96.403) 99.453,95.513 cw(c99.453,96.403) 98.823,95.774 ; 98.842,95.754 cw(c97.952,94.864) 99.211,94.864 ccw(c97.952,94.864) 98.842,95.754
NetC2_2: C2.2 D7.2 Q6.2 R2.1 U2.1 | length 10.3
  Top Layer w0.508: C2.2@85.892,76.867 C2.2@86.03,77.005
  Top Layer w0.635: U2.1@84.256,77.113 84.339,77.03 88.113,77.03 88.381,76.762 Q6.2@89.553,76.762 ; D7.2@85.692,75.218 ccw(c85.21,75.7) 85.892,75.7 ccw(c86.574,75.7) D7.2@86.091,75.218 ; D7.2@85.892,75.018 C2.2@85.892,76.867 ; 85.892,76.375 cw(c86.634,76.375) C2.2@86.109,76.901 ; R2.1@88.064,77.135 ccw(c88.964,78.034) 88.964,76.762
  Top Layer w0.8: R2.1@87.839,77.113 R2.1@87.935,77.208
NetC6_2: C6.2 R3.1 U1.4 | length 11.5
  Top Layer w1: U1.4@97.942,84.252 U1.4@97.942,85.065 ; U1.4@97.942,85.649 U1.4@97.942,85.065 ; R3.1@98.671,80.85 R3.1@98.913,80.607 97.757,81.764 C6.2@97.757,82.855 97.757,83.396 97.739,83.414 97.942,83.617 ; 97.942,83.617 ccw(c98.517,83.042) 97.722,82.872 cw(c98.517,83.042) 97.942,83.617 ; 97.942,83.617 U1.4@97.942,85.065 ; 97.481,83.672 cw(c96.729,82.92) 97.792,82.878 ccw(c96.729,82.92) 97.481,83.672 ; R3.1@98.315,81.206 ccw(c98.913,81.804) 98.913,80.958 cw(c98.913,81.804) R3.1@98.315,81.206
NetC10_1: C10.1 D2.1 U3.34 | length 3.7
  Top Layer w0.203: D2.1@68.627,81.485 68.64,81.471 U3.34@70.098,81.471 ; D2.1@68.756,81.378 cw(c68.982,81.152) 68.982,81.471 ccw(c68.982,81.152) D2.1@68.756,81.378 ; D2.1@68.756,81.591 ccw(c69.046,81.881) 69.046,81.471 cw(c69.046,81.881) D2.1@68.756,81.591
  Top Layer w0.5: C10.1@67.506,81.483 D2.1@68.552,81.483
NetC10_2: C10.2 C11.2 L1.1 | length 2.3
  Top Layer w0.5: L1.1@64.382,81.483 65.449,81.483 C11.2@65.481,81.515 66.624,81.515 C10.2@66.656,81.483
NetC12_2: C12.2 L1.2 L2.1 | length 2.6
  Top Layer w0.5: L2.1@60.979,81.509 62.211,81.509 C12.2@62.23,81.49 63.449,81.49 L1.2@63.532,81.407
NetC13_2: C13.2 L2.2 L3.1 | length 2.4
  Top Layer w0.5: L3.1@57.702,81.534 58.921,81.534 C13.2@58.928,81.541 60.096,81.541 L2.2@60.129,81.509
NetC15_1: C15.1 JiGuang.2 Q3.3 | length 13.1
  Top Layer w0.381: v1(59.538,92.583) 59.538,91.973 59.741,91.77 61.709,91.77 JiGuang.2@61.724,91.755 ; 59.538,92.198 cw(c59.923,92.198) 59.65,92.47 ccw(c59.923,92.198) 59.538,92.198 ; 59.538,92.198 ccw(c59.153,92.198) 59.425,92.47 cw(c59.153,92.198) 59.538,92.198 ; 60.781,91.77 cw(c60.781,91.212) 61.176,91.607 ccw(c60.781,91.212) 60.781,91.77 ; 60.855,91.77 ccw(c60.855,92.224) 61.176,91.903 cw(c60.855,92.224) 60.855,91.77
  Bottom Layer w0.381: C15.1@58.082,95.479 58.082,94.013 58.472,93.623 Q3.3@59.525,93.623 59.538,93.611 v1(59.538,92.583) ; 58.082,94.791 cw(c58.744,94.791) 58.276,95.26 ccw(c58.744,94.791) 58.082,94.791 ; 58.082,94.791 ccw(c57.419,94.791) 57.888,95.26 cw(c57.419,94.791) 58.082,94.791 ; 59.538,92.968 cw(c59.153,92.968) 59.425,92.696 ccw(c59.153,92.968) 59.538,92.968 ; 59.538,92.968 ccw(c59.923,92.968) 59.65,92.696 cw(c59.923,92.968) 59.538,92.968
NetC22_2: C22.2 U3.17 | length 3.6
  Top Layer w0.203: U3.17@75.096,81.471 78.314,81.471 C22.2@78.554,81.712
NetC25_1: C25.1 D3.2 L4.1 | length 16.8
  Top Layer w0.508: L4.1@90.323,85.515 cw(c88.911,84.103) C25.1@90.908,84.103 ; L4.1@90.323,85.743 cw(c88.911,84.331) C25.1@90.908,84.331 ; C25.1@90.677,83.104 cw(c88.624,81.051) D3.2@91.484,81.552 ; C25.1@90.677,83.875 ccw(c90.121,84.432) 90.908,84.432 ccw(c91.695,84.432) C25.1@91.138,83.875 ; 90.908,83.009 cw(c90.908,82.277) 91.425,82.794 ; 90.908,84.721 cw(c92.03,84.721) L4.1@91.236,85.515 ; 90.908,84.95 cw(c92.03,84.95) L4.1@91.236,85.743 ; 90.908,85.043 ccw(c92.128,85.043) C25.1@91.265,84.18 ; L4.1@90.932,85.972 90.908,85.947 90.908,83.312 91.527,82.692 ; C25.1@91.036,83.463 cw(c89.851,82.278) 91.527,82.278 ; C25.1@91.234,83.335 ccw(c92.076,83.335) 91.48,82.739 ; D3.2@91.259,81.437 ccw(c90.611,82.085) D3.2@91.527,82.085 ; C25.1@91.281,83.427 ccw(c91.564,83.183) 91.3,82.92 ; D3.2@91.527,81.97 ccw(c92.281,81.97) D3.2@91.748,81.437
NetD3_1: D3.1 Q4.3 | length 4.4
  Top Layer w0.508: Q4.3@85.662,81.282 D3.1@88.298,81.282 ; 86.531,81.282 ccw(c86.531,83.025) D3.1@87.764,81.792 ; D3.1@87.415,81.282 ccw(c87.415,81.811) D3.1@87.789,81.437
NetL4_2: L4.2 U5.2 | length 11
  Top Layer w0.508: U5.2@89.527,90.656 89.53,90.653 90.246,90.653 90.78,90.119 ; L4.2@90.327,89.038 ccw(c89.263,90.119) 90.78,90.119 ; L4.2@90.385,89.318 ccw(c89.768,90.119) 90.78,90.119 ; L4.2@90.78,88.577 L4.2@90.78,88.73 ; L4.2@90.932,88.577 L4.2@90.78,88.73 ; L4.2@91.174,89.318 cw(c91.791,90.119) 90.78,90.119 ; L4.2@91.233,89.038 cw(c92.297,90.119) 90.78,90.119 ; L4.2@90.78,88.73 90.78,90.119 ; U5.2@89.762,90.61 cw(c89.762,89.337) 90.662,90.237 ccw(c89.762,89.337) U5.2@89.762,90.61 ; U5.2@89.773,90.611 cw(c89.954,89.879) 90.487,90.412 ccw(c89.954,89.879) U5.2@89.773,90.611
NetLED1_2: LED1.2 R8.1 | length 8.8
  Top Layer w0.203: R8.1@67.208,67.15 67.208,64.631 LED1.2@67.335,64.505 ; 67.208,66.272 cw(c68.086,66.272) 67.465,66.893 ccw(c68.086,66.272) 67.208,66.272 ; 67.208,66.272 ccw(c66.331,66.272) 66.951,66.893 cw(c66.331,66.272) 67.208,66.272 ; LED1.2@66.877,64.723 ccw(c66.075,65.524) 67.208,65.524 cw(c66.075,65.524) LED1.2@66.877,64.723 ; LED1.2@67.02,64.579 ccw(c66.566,65.033) 67.208,65.033 cw(c66.566,65.033) LED1.2@67.02,64.579 ; 67.208,64.975 ccw(c67.565,64.975) 67.313,64.723 cw(c67.565,64.975) 67.208,64.975